# Altium PCB Kanaloa_v2.0.0_Waho.PcbDoc
Units mil, origin at the board's own origin, x right, y up, seen from the top; angles counter-clockwise.
Board outline 7712.99 x 7999.7 mil, 4 copper layers (Top Layer, +24V, Internal Plane 2, Bottom Layer), stack 62 mil thick; 22 components, 106 nets, 363 pads, 39 vias.
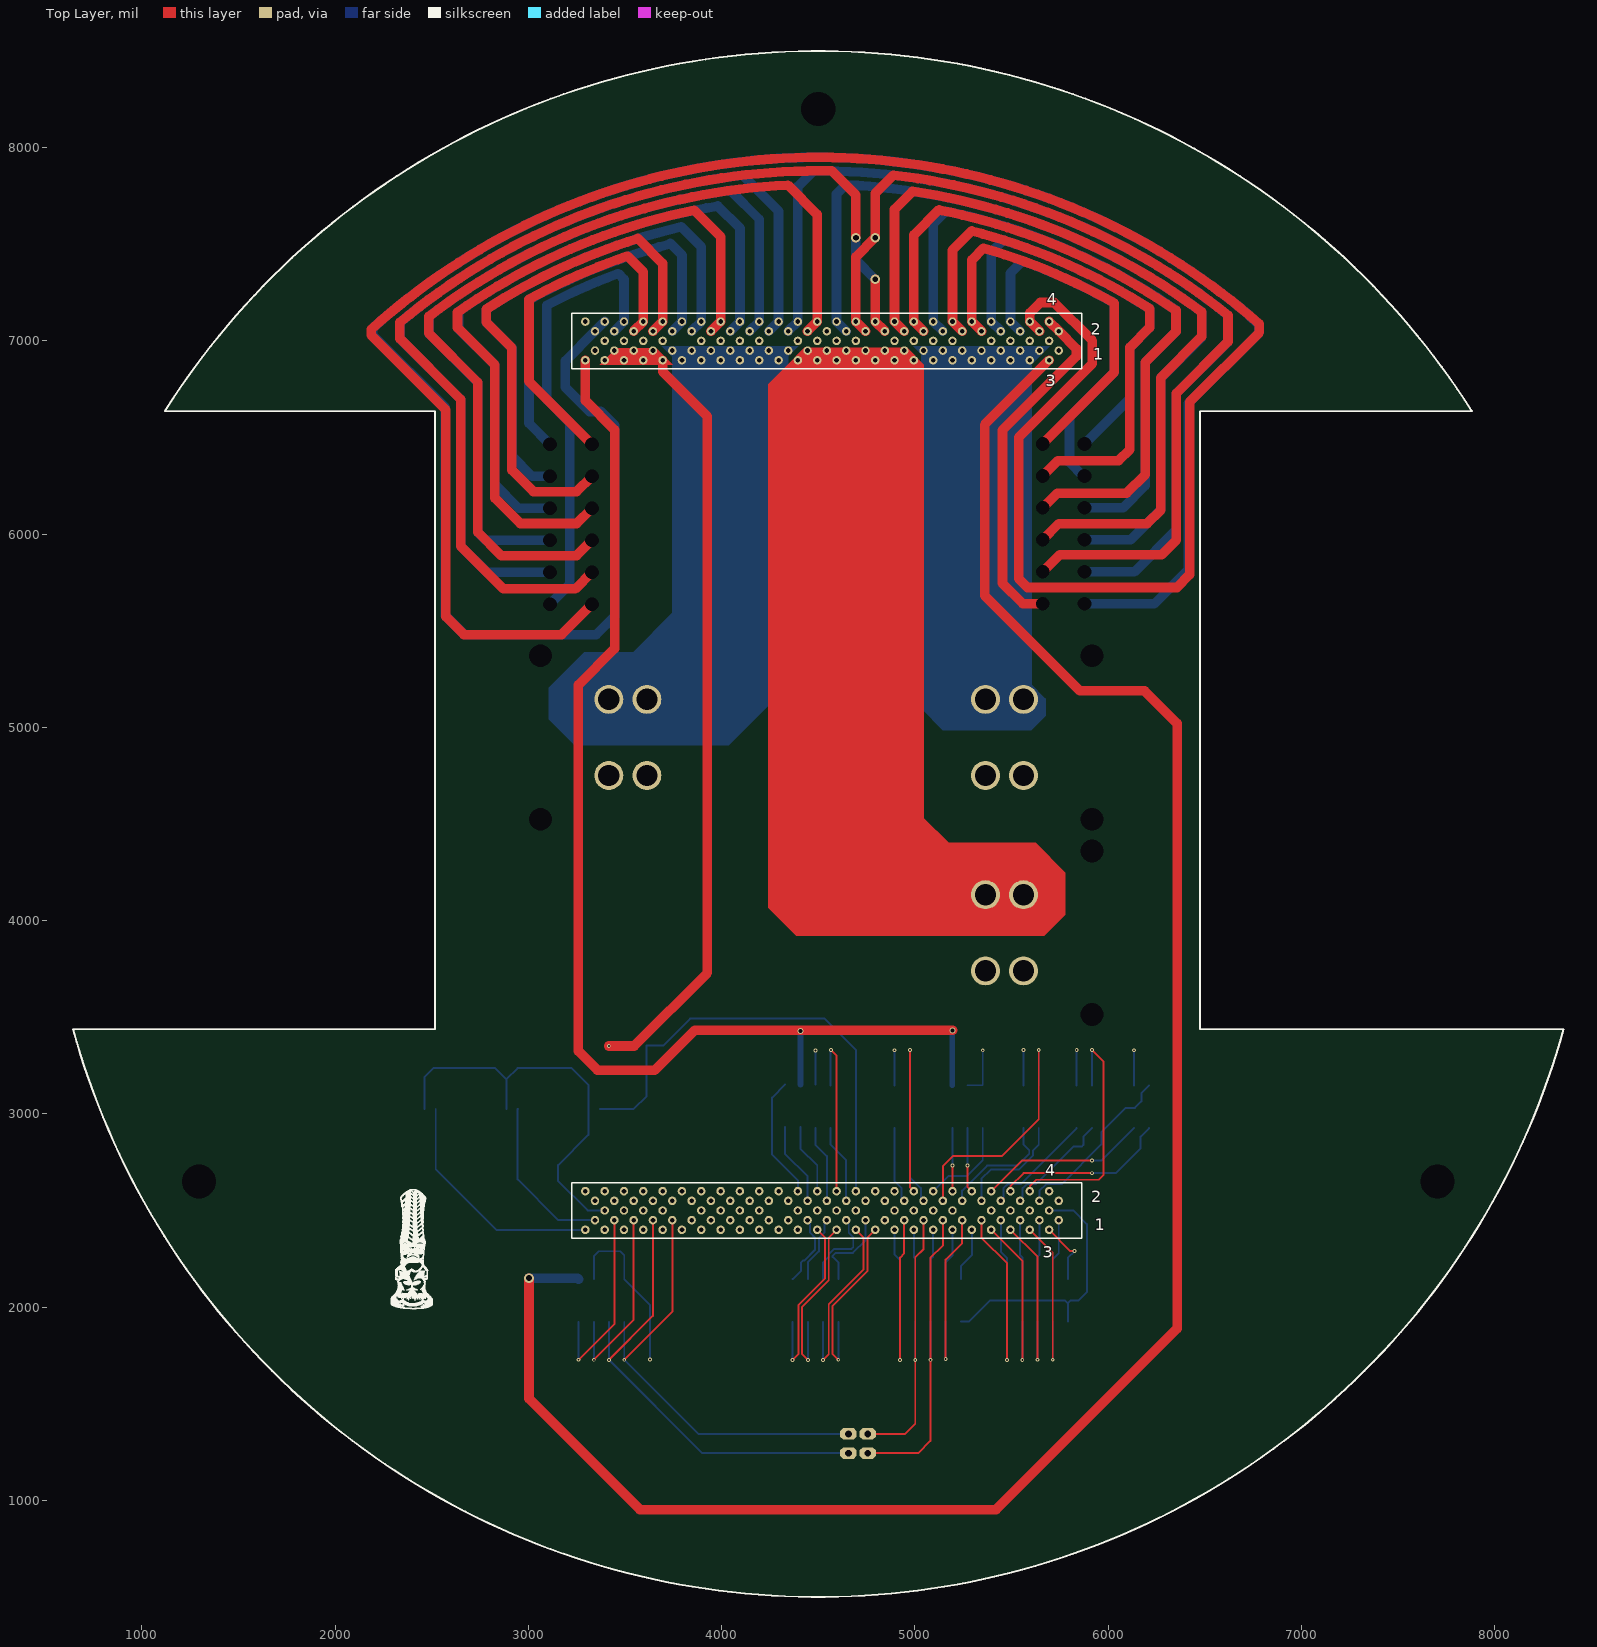
[diagram p0: Top Layer view]
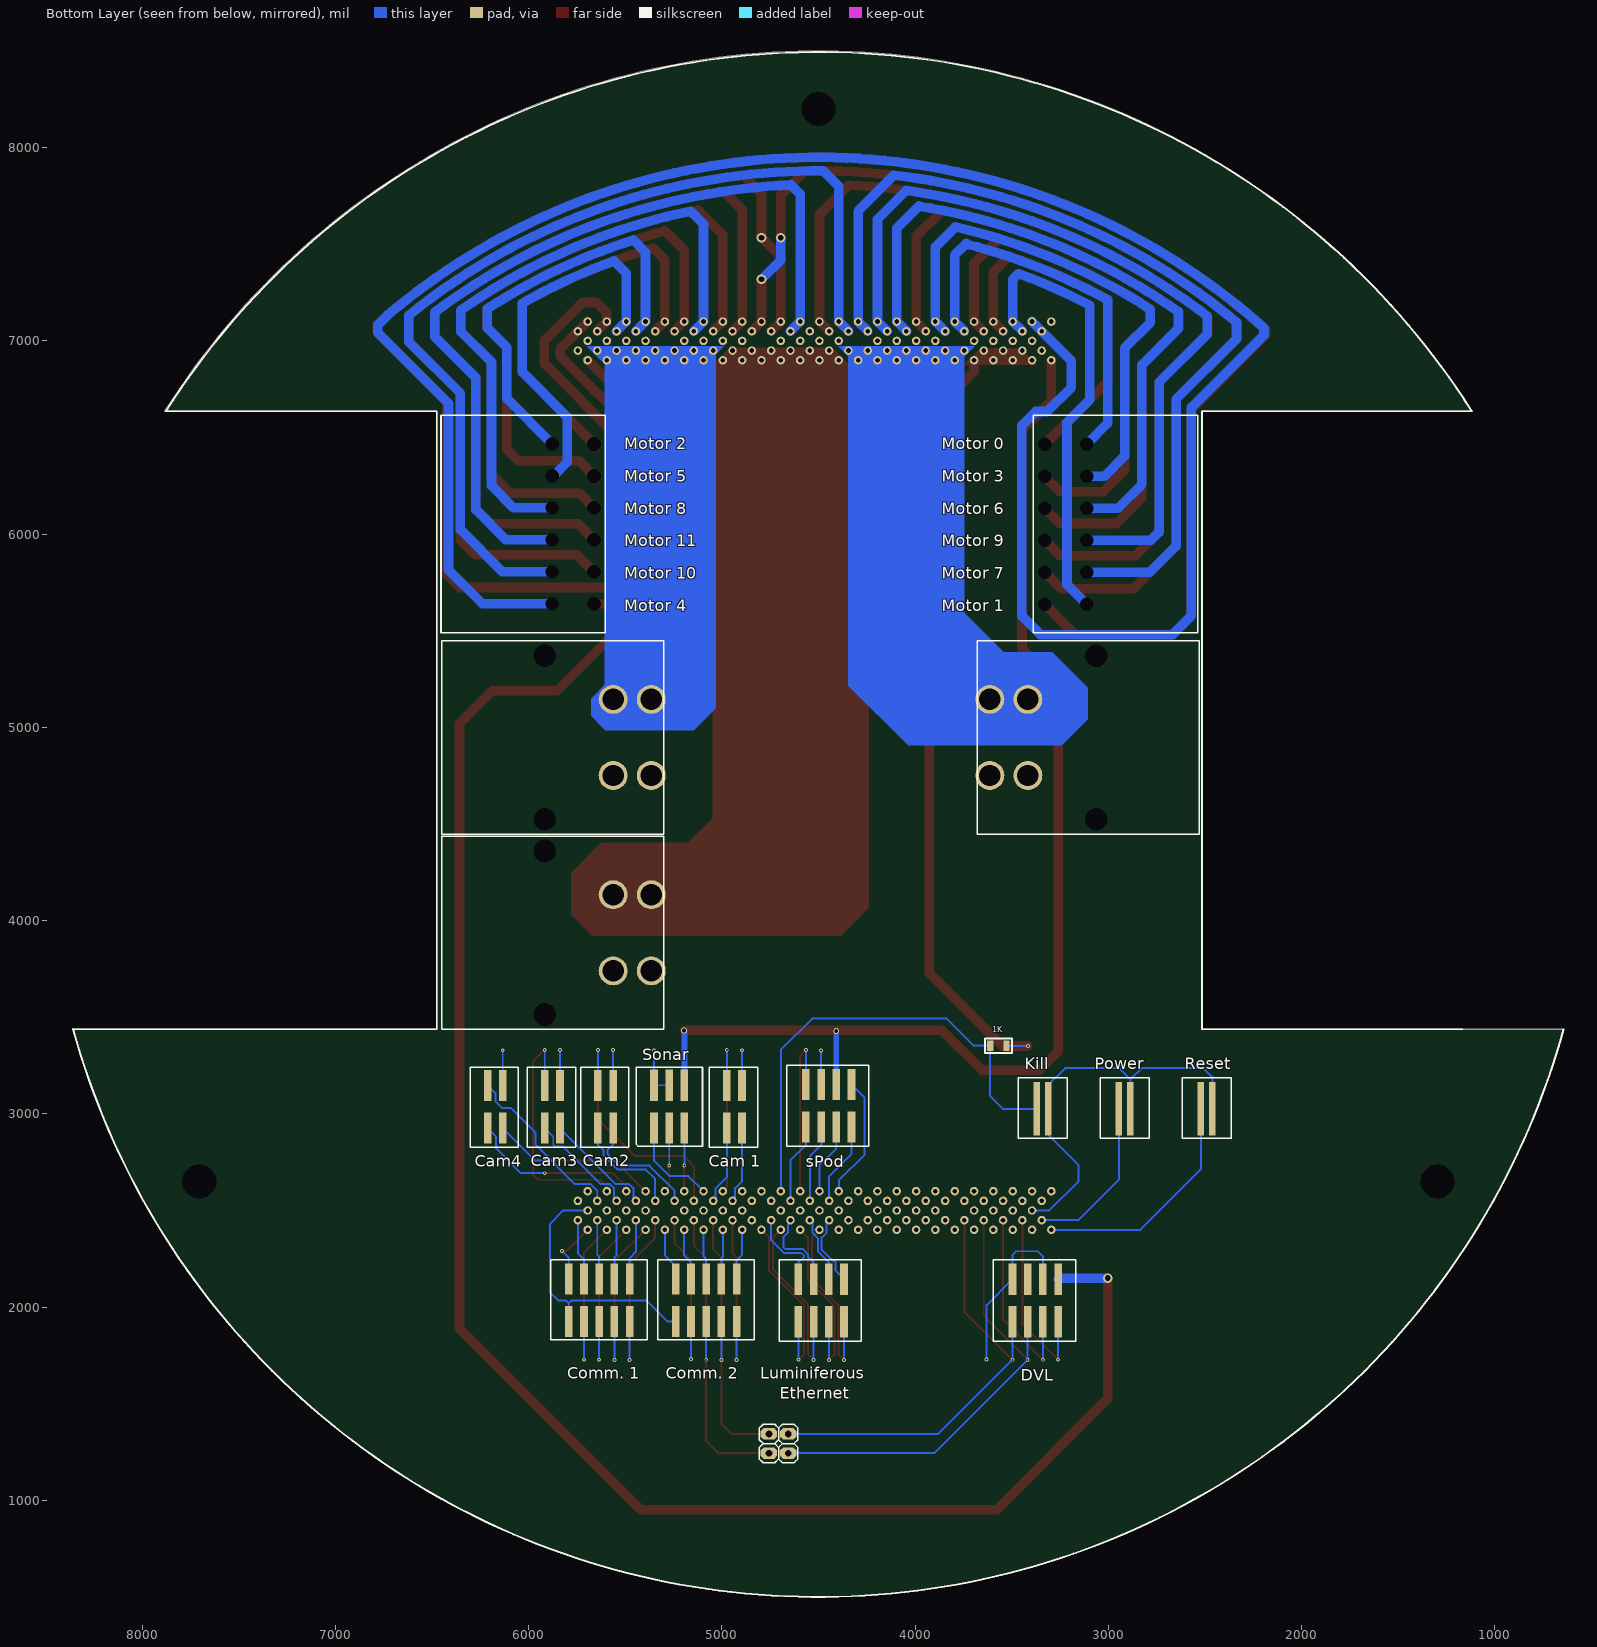
[diagram p1: Bottom Layer view, seen from below]
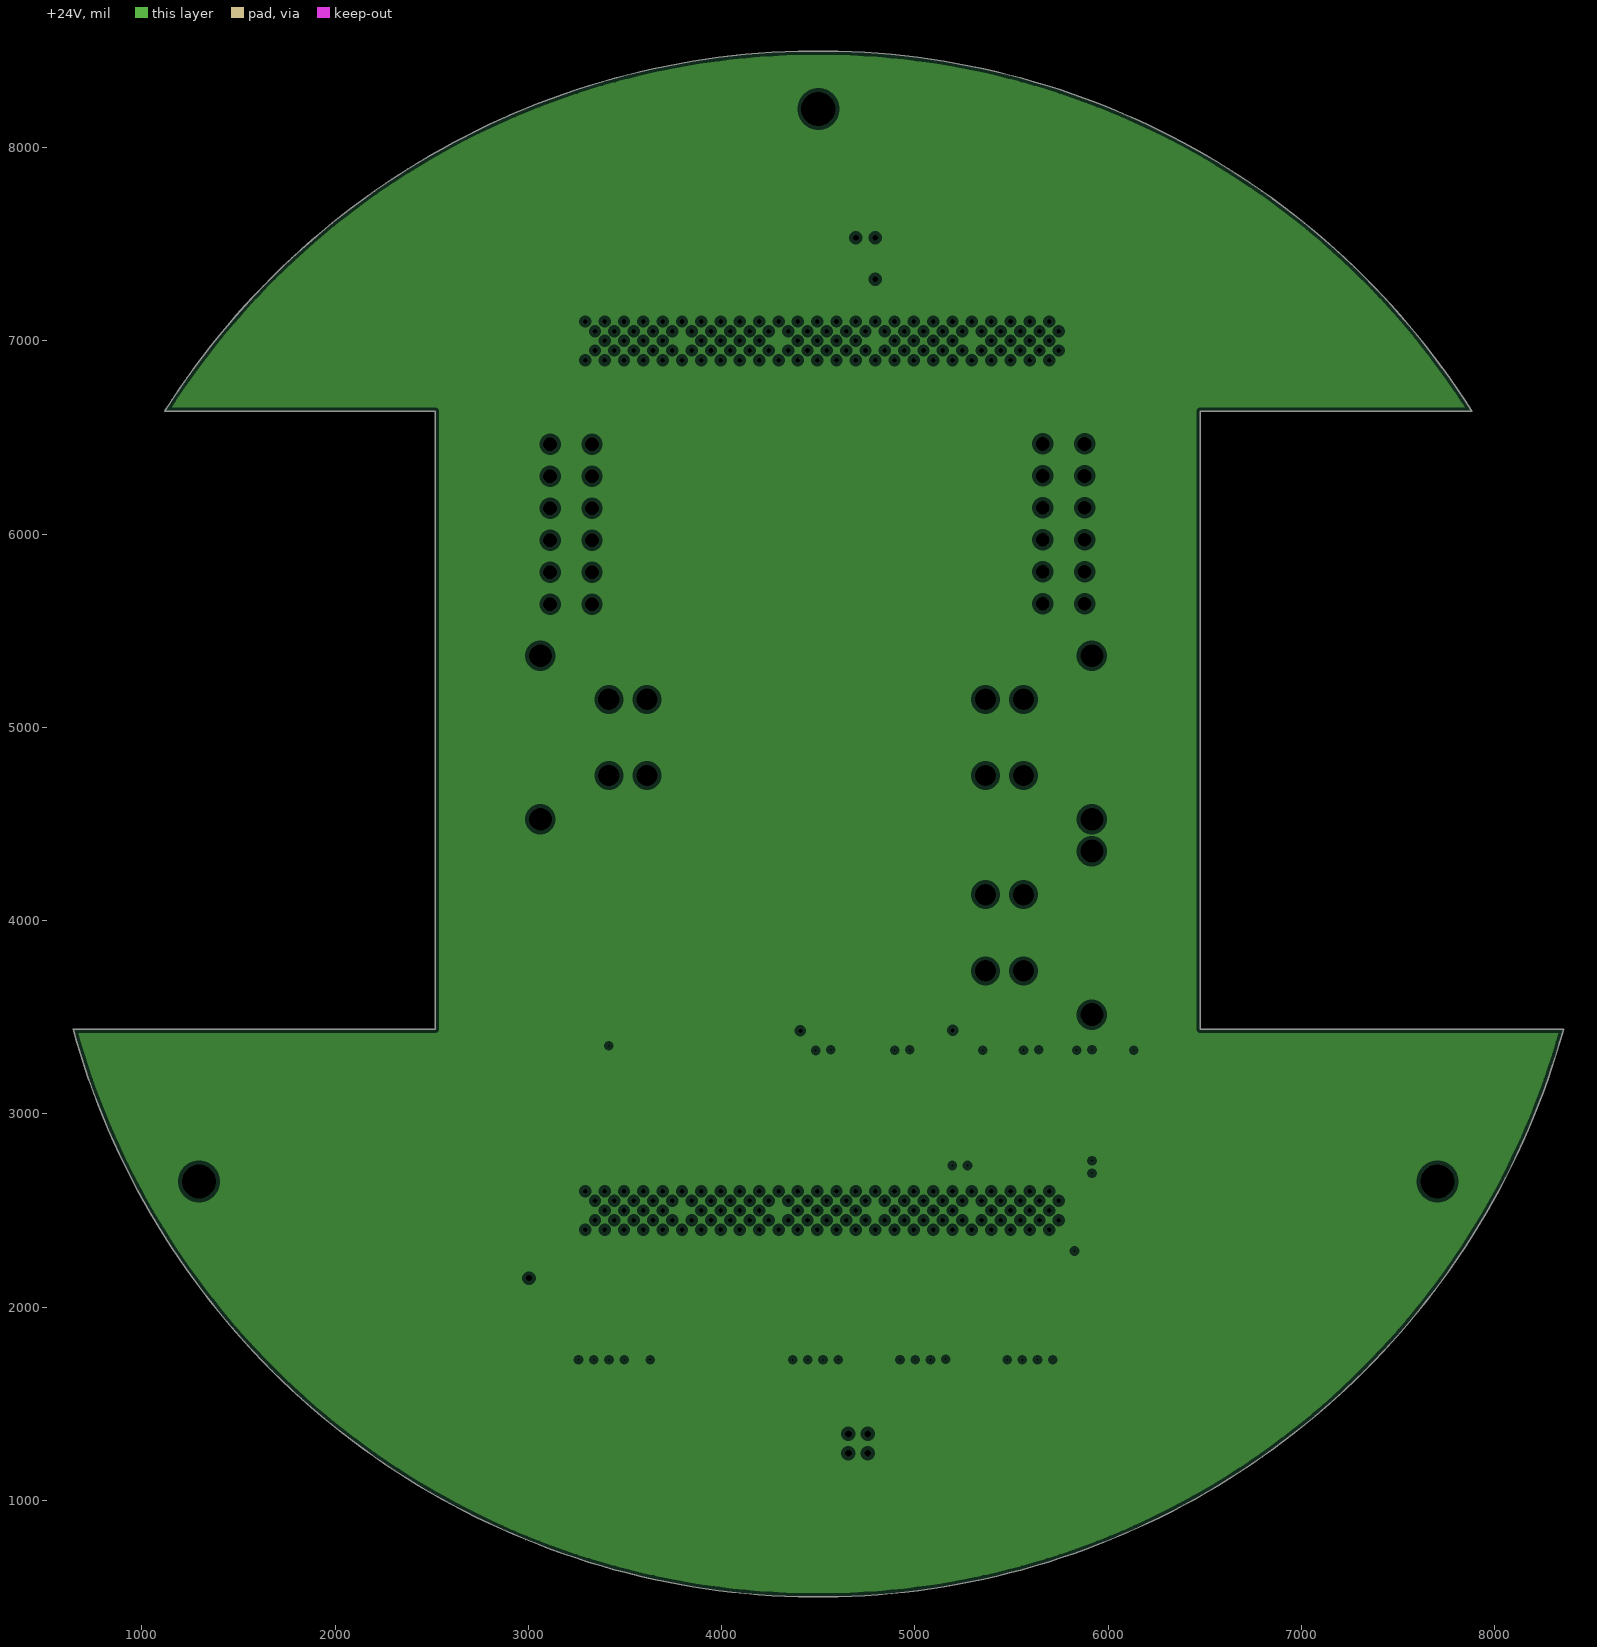
[diagram p2: +24V, clearances drawn from the general rule]
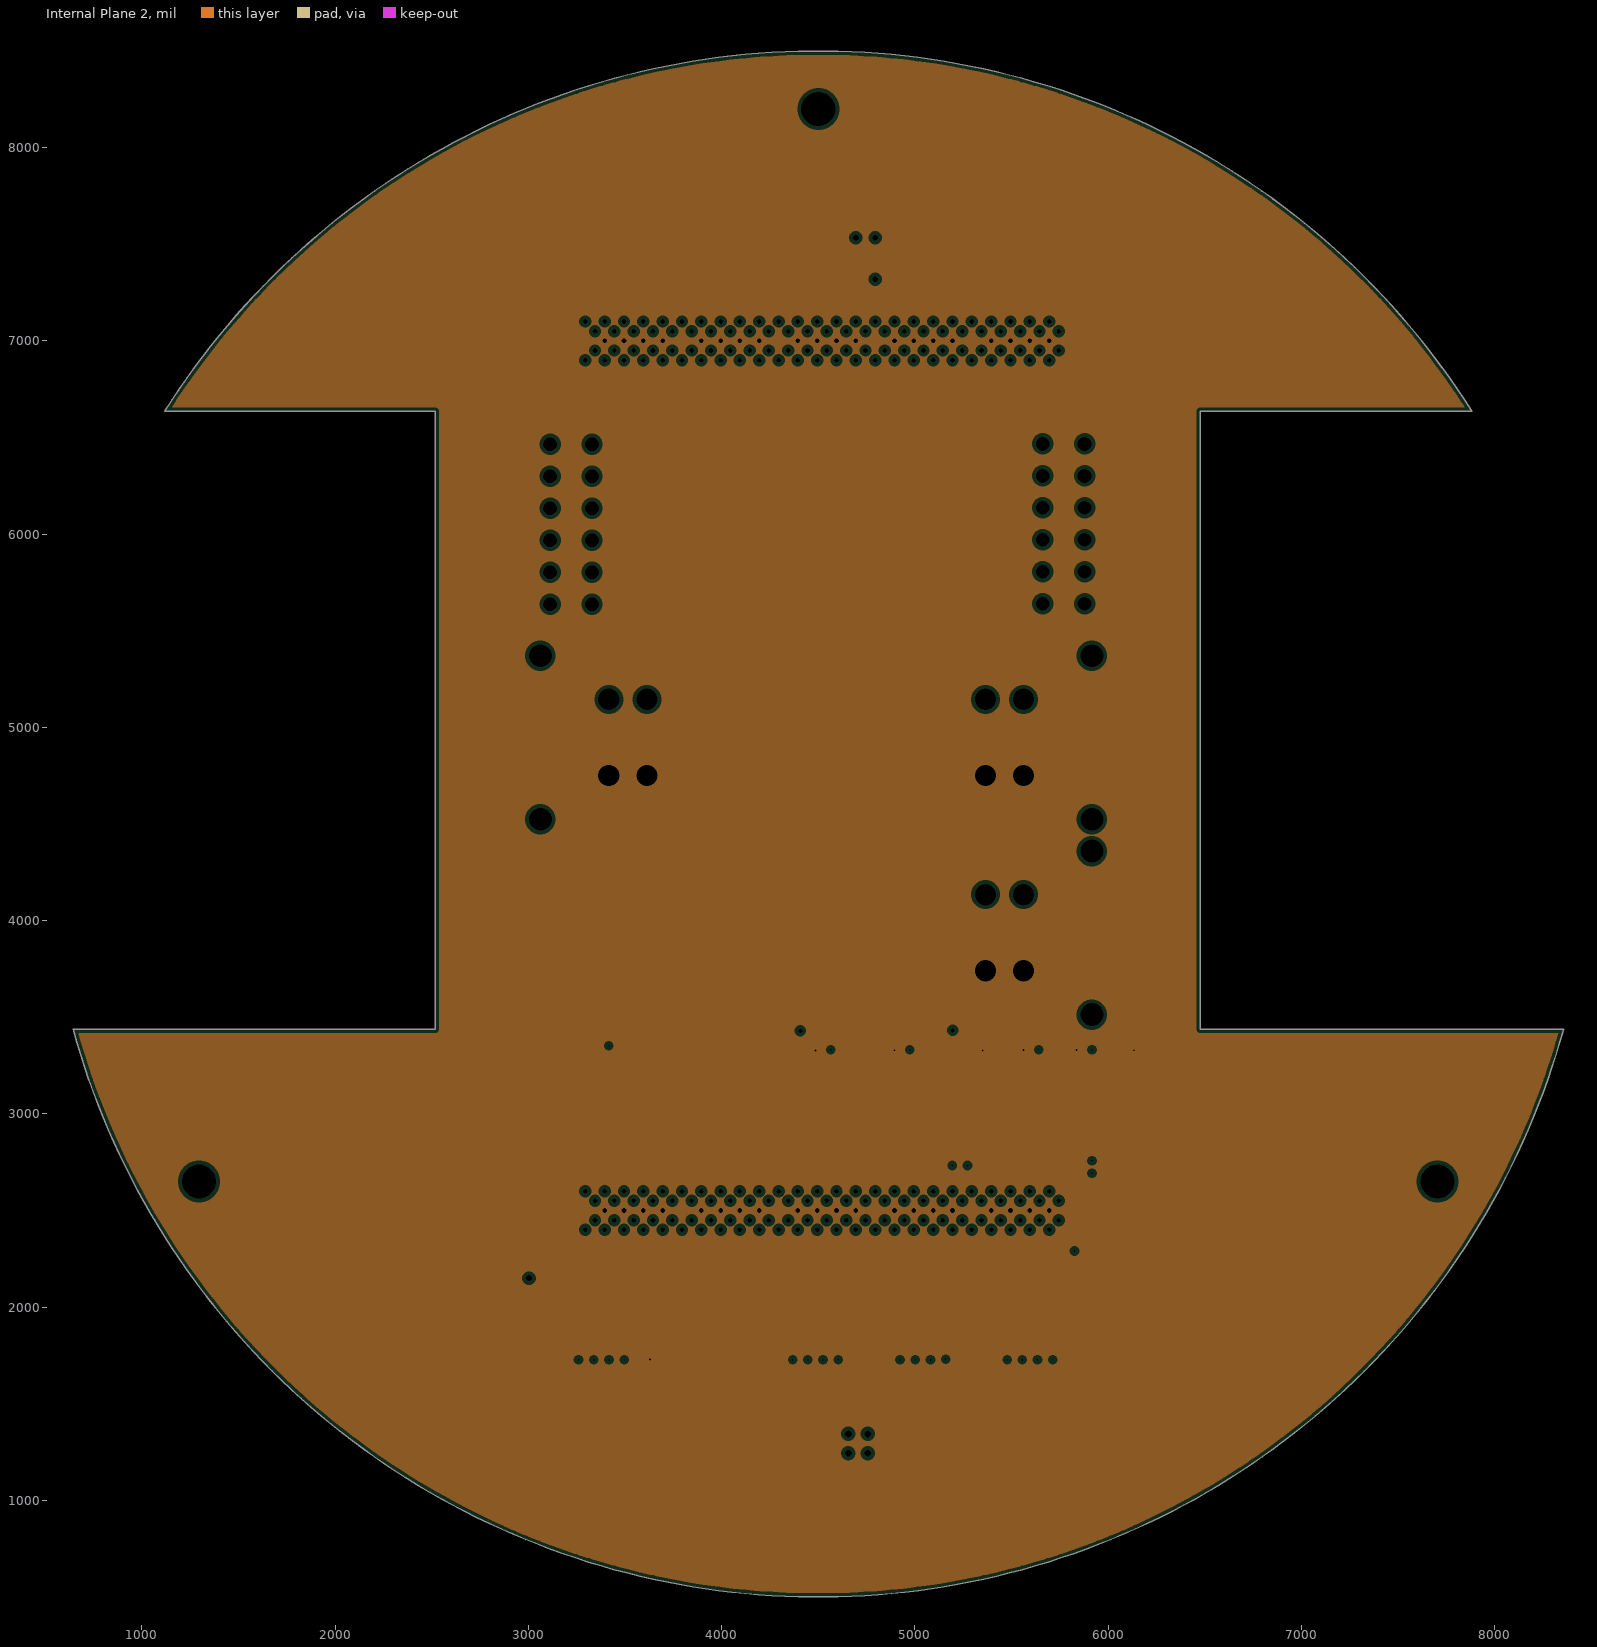
[diagram p3: Internal Plane 2, clearances drawn from the general rule]
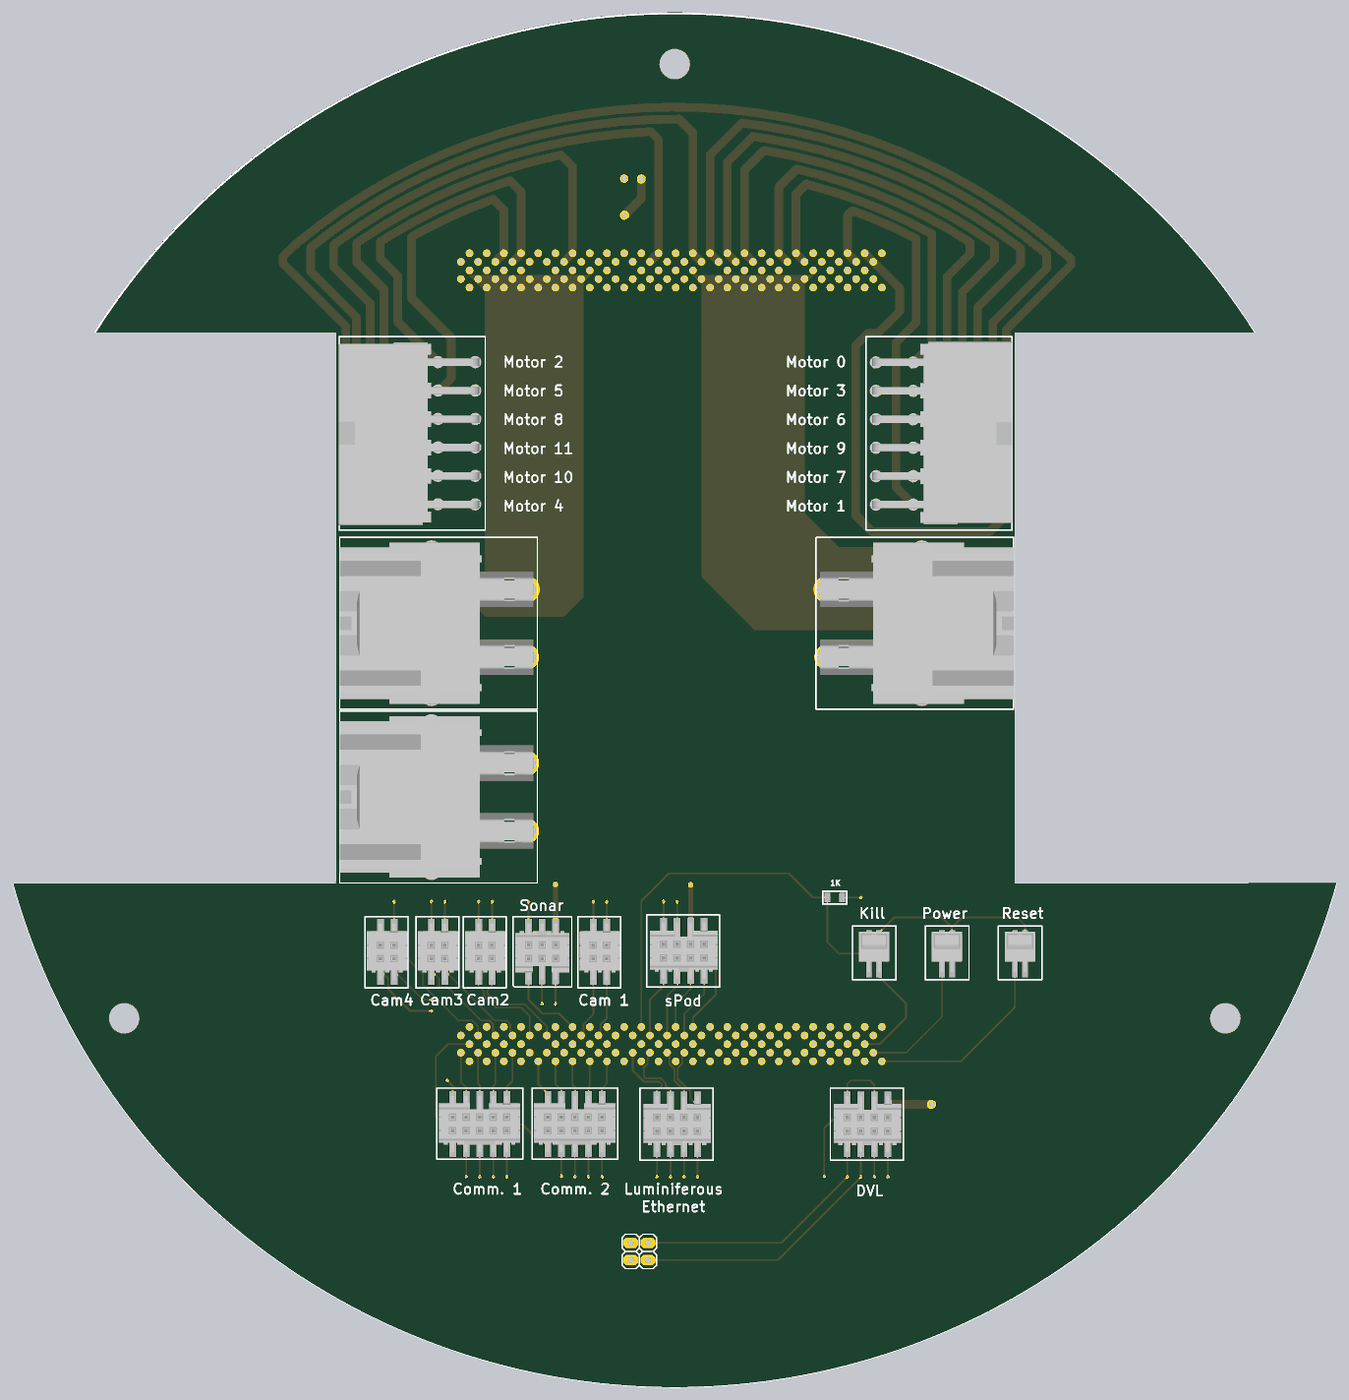
[diagram p4: 3D render of the assembled board from below, using the file's embedded part models]

## Layer stack, top to bottom
Top Layer: signal copper 1.4
Dielectric: core 8.2, FR-4, Dk 4.8
+24V: plane copper 1.4, net +24V
Dielectric: prepreg 40, FR-4, Dk 4.8
Internal Plane 2: plane copper 1.4, net GND
Dielectric: core 8.2, FR-4, Dk 4.8
Bottom Layer: signal copper 1.4

## Board outline
643.66,3438 2517,3438 2517,6636 1118.22,6636 1118.22,6636.25 cw(c4500,4500) 7881.87,6636.11 7881.87,6636 6476,6636 6476,3438 8356.55,3438 8356.45,3438.03 cw(c4500,4500)

## Design rules (kind name [scope] priority, off if disabled: settings)
Clearance [All] p1: gap=10
DiffPairsRouting [All] p1: maxlimit=10 minlimit=10 mostfreqgap=10 maxuncoupledlength=500
PlaneClearance [All] p1: clearance=20
PlaneConnect PlaneConnect_1 [(ObjectKind = 'Pad') And (Name = '-GND')] p1: planeconnectstyle=Direct reliefexpansion=20 reliefentries=4 reliefconductorwidth=10 reliefairgap=10
PlaneConnect [All] p2: planeconnectstyle=Relief reliefexpansion=20 reliefentries=4 reliefconductorwidth=10 reliefairgap=10
PolygonConnect [All] p1: connectstyle=Relief reliefconductorwidth=10 reliefentries=4 polygonreliefangle="90 Angle"
RoutingVias [All] p1: holewidth=28 width=50 viastyle="Through Hole" minholewidth=28 minwidth=50 maxholewidth=28 maxwidth=50
SilkscreenOverComponentPads [All] p1: minsilkscreentomaskgap=10
SolderMaskExpansion [All] p1: expansion=4
Width [All] p1: maxlimit=1000 minlimit=10 preferedwidth=10
24 further rules are at their usual default settings.

## Classes and differential pairs
differential pair USB1: +USB_DP_1 -USB_DM_1
differential pair USB2: +USB_DP_2 -USB_DM_2
differential pair USB_DM_3: +USB_DP_3 -USB_DM_3
differential pair USB4: +USB_DP_4 -USB_DM_4
differential pair USB5: +USB_DP_5 -USB_DM_5
differential pair SonarDiff: +Sonar_DP -Sonar_DM
differential pair LAN0: +LAN0 -LAN0#
differential pair LAN1: +LAN1 -LAN1#
differential pair LAN2: +LAN2 -LAN2#
differential pair Lan3: +LAN3 -LAN3#
differential pair Kill_Diff: +Kill_DP -Kill_DM
differential pair USB_7: +USB_DP_7 -USB_DM_7
differential pair USB_6: +USB_DP_6 -USB_DM_6

## Components (designator, comment, footprint, x,y, rotation, side; value= is the part's Value field where it differs from the comment)
? "" "5536272-4 CON" 4544.49,2500 r0 top
? "" "Male 2x2" 4656,1244 r90 bottom
? "" 46911-1012 3112,6464.8 r90 bottom
? "" 46911-1012 5878,5639.8 r270 bottom
? "" "Molex 42820-2213" 6450,3937 r270 bottom
? "" "Molex 42820-2213" 6450,4948 r270 bottom
? "sPod" 98424-G52-08ALF 4563.74,2926.76 r180 bottom
? "Cam 1" 98424-G52-04ALF 4974,2926.76 r180 bottom
? "Cam2" 98424-G52-04ALF 5641,2926.76 r180 bottom
? "Cam3" 98424-G52-04ALF 5916,2926.76 r180 bottom
? "Cam4" 98424-G52-04ALF 6212,2926.76 r180 bottom
? "Sonar" 98424-G52-06ALF 5194.78,3152.76 r0 bottom
? "" 98424-G52-08ALF 4602.24,1919.24 r180 bottom
? "DVL" 98424-G52-08ALF 3494.48,1919.24 r180 bottom
? "Comm. 1" "FCI 10POS" 5792,2035.57 r180 bottom
? "Comm. 2" "FCI 10POS" 5238.12,2035.57 r180 bottom
? "" "Molex 42820-2213" 2528,4948 r90 bottom
? "" "5536272-4 CON" 4544.49,7000 r0 top
? "" 5-1775443-2 2491,3026 r180 bottom
? "" 5-1775443-2 2915.5,3026 r180 bottom
? "" 5-1775443-2 3340,3026 r180 bottom
? "1K" "R 0805 (2012) RESISTOR" 3569,3353 r180 bottom

## Footprints (in the part's own frame and the unit in brackets; to place one, negate y for a bottom-side part, rotate by r counter-clockwise, add the part's x,y. Pads: shape width x height; smd on the part's side, far side on the other; paste and mask are expansions set on the pad)
5-1775443-2 [mm] "CONN HEADER 1.5MM 2 POS Vert SMD"
  rect 0.85x7 smd: 1(-0.75,0) 2(0.75,0)
  silkscreen extent -3.2,-3.86 3.25,4.09, body extent -2.25,-2.73 2.25,3.27, height 4.95
46911-1012 [mil] "12 Pos Right Angle Molex Conn"
  round 60 hole 71: 1(0,0) 2(-165.4,0) 3(-330.8,0) 4(-496.2,0) 5(-661.6,0) 6(-827,0) 7(0,217) 8(-165.4,217) 9(-330.8,217) 10(-496.2,217) 11(-661.6,217) 12(-827,217)
  silkscreen extent -975,-575 150,275, body extent -942,-576 122,240, height 444
98424-G52-04ALF [mm] "FCI Connector"
  rect 1x4.1 smd: 1(0,0) 2(2,0) 3(0,5.6) 4(2,5.6)
  silkscreen extent -2.29,-2.54 4.06,8, body extent -2.03,-1.71 3.97,7.29, height 6.43
98424-G52-06ALF [mm] "FCI 6pos"
  rect 1x4.1 smd: 1(-0.032,0.121) 2(1.968,0.121) 3(3.968,0.121) 4(-0.032,5.721) 5(1.968,5.721) 6(3.968,5.721)
  silkscreen extent -2.41,-2.26 6.27,8.15, body extent -2.04,-1.57 5.96,7.43, height 6.43
98424-G52-08ALF [mm] "FCI 8Pos"
  rect 1x4.1 smd: 1(-0.032,0.121) 2(1.968,0.121) 3(3.968,0.121) 4(5.968,0.121) 5(-0.032,5.721) 6(1.968,5.721) 7(3.968,5.721) 8(5.968,5.721)
  silkscreen extent -2.54,-2.41 8.26,8.25, body extent -2.05,-1.6 7.95,7.4, height 6.43
"5536272-4 CON" [mil] "TE Mezzanine Connector"
  round 44 hole 24 mask+0: 1(1200,-50) 2(1200,50) 3(1150,-100) 4(1150,100) 5(1100,-50) 6(1100,50) 7(1050,-100) 8(1050,100) 9(1000,-50) 10(1000,50) 11(950,-100) 12(950,100) 13(900,-50) 14(900,50) 15(850,-100) 16(850,100) 17(800,-50) 18(800,50) 19(750,-100) 20(750,100) 21(700,-50) 22(700,50) 23(650,-100) 24(650,100) 25(600,-50) 26(600,50) 27(550,-100) 28(550,100) 29(500,-50) 30(500,50) 31(450,-100) 32(450,100) 33(400,-50) 34(400,50) 35(350,-100) 36(350,100) 37(300,-50) 38(300,50) 39(250,-100) 40(250,100) 41(200,-50) 42(200,50) 43(150,-100) 44(150,100) 45(100,-50) 46(100,50) 47(50,-100) 48(50,100) 49(0,-50) 50(0,50) 51(-50,-100) 52(-50,100) 53(-100,-50) 54(-100,50) 55(-150,-100) 56(-150,100) 57(-200,-50) 58(-200,50) 59(-250,-100) 60(-250,100) 61(-300,-50) 62(-300,50) 63(-350,-100) 64(-350,100) 65(-400,-50) 66(-400,50) 67(-450,-100) 68(-450,100) 69(-500,-50) 70(-500,50) 71(-550,-100) 72(-550,100) 73(-600,-50) 74(-600,50) 75(-650,-100) 76(-650,100) 77(-700,-50) 78(-700,50) 79(-750,-100) 80(-750,100) 81(-800,-50) 82(-800,50) 83(-850,-100) 84(-850,100) 85(-900,-50) 86(-900,50) 87(-950,-100) 88(-950,100) 89(-1000,-50) 90(-1000,50) 91(-1050,-100) 92(-1050,100) 93(-1100,-50) 94(-1100,50) 95(-1150,-100) 96(-1150,100) 97(-1200,-50) 98(-1200,50) 99(-1250,-100) 100(-1250,100) GND(-1150,0) GND(-1050,0) GND(-950,0) GND(-850,0) GND(-650,0) GND(-550,0) GND(-450,0) GND(-350,0) GND(-150,0) GND(-50,0) GND(50,0) GND(150,0) GND(350,0) GND(450,0) GND(550,0) GND(650,0) GND(850,0) GND(950,0) GND(1050,0) GND(1150,0)
  silkscreen extent -1320,-143 1320,143, body extent -1377,-139 1337,149, height 341
"FCI 10POS" [mm] "98424-G52-10ALF"
  rect 1x4.1 smd: 1(0,-2.8) 2(2,-2.8) 3(4,-2.8) 4(6,-2.8) 5(8,-2.8) 6(0,2.8) 7(2,2.8) 8(4,2.8) 9(6,2.8) 10(8,2.8)
  silkscreen extent -2.34,-5.2 10.34,5.3, body extent -2.04,-4.5 9.96,4.5, height 6.43
"Male 2x2" [mil]
  oct 60x85 hole 35: 1(0,0) 2(100,0) 3(0,100) 4(100,100)
  silkscreen extent -50,-50 150,150, body extent -50,-50 150,150, height 460
"Molex 42820-2213" [mil] "MOLEX mini-fit senior"
  round 150 hole 110: 0(-197,1085) 2(-197,888) 3(197,888) ""(197,1085)
  round 60 hole 118: 4(-423,534) 5(423,534)
  silkscreen extent -500,0 500,1150, body extent -469,0 469,1126, height 563
"R 0805 (2012) RESISTOR" [mm] "0805 (2012) Resistor"
  rect 0.85x1.4 smd: 1(-1.075,0) 2(1.075,0)
  silkscreen extent -1.78,-0.95 1.78,0.95, body extent -1.19,-0.65 1.19,0.65, height 0.85

## Free pads (board coordinates)
  round 0 hole 177: 10(4500,8200) 11(1295.71,2650) 12(7704.29,2650)

## Via types
v1: diameter 20, hole 10, Top Layer to Bottom Layer, 33 vias
v2: diameter 50, hole 30, Top Layer to Bottom Layer, 4 vias
v3: diameter 30, hole 20, Top Layer to Bottom Layer, 2 vias

## Nets (pads, with @x,y where several pads share a name; then routed paths per layer and width w, separated by ;. In a path a pad name is that pad's centre, name@x,y a point inside that pad or via, vN(x,y) a via of type N, cw(c..) or ccw(c..) an arc to the next point about the centre after c; other vN are vias at no path point)
+3.3V: ?.1@5744.49,6950
+5V: ?.2@3526.68,3353 ?.83@3694.49,6900 ?.85@3644.49,6950 ?.87@3594.49,6900 ?.89@3544.49,6950 ?.91@3494.49,6900 ?.93@3444.49,6950 ?.95@3394.49,6900 | length 4044
  Top Layer w50: v1@3416,3351 3547,3351 3926,3730 3926,6609 3694.49,6840.51 ?.83@3694.49,6900
  Bottom Layer w10: v1(3416,3352) 3525.68,3352 ?.2@3526.68,3353
+12V: ?.1@5193.52,3148 ?.7@4407.52,3152 ?.99@3294.49,6900 | length 6341.1
  Top Layer w50: ?.99@3294.49,6900 3294.49,6691.51 3446,6540 3446,5408 3258,5220 3258,3325 3357,3226 3654,3226 3860,3432 v3(5195,3432)
  Bottom Layer w30: ?.7@4407.52,3152 v3(4407.52,3429.52) ; ?.1@5193.52,3148 5193.52,3430.52 v3(5195,3432)
+24V: 
+24VReg: ?.3@5694.49,6900 ?.8@3259.52,2144.47 | length 10620
  Top Layer w50: v2(3003,2150) 3003,1526 3577,952 5420,952 6357,1889 6357,5020 6188,5189 5854,5189 5361,5682 5361,6566.51 ?.3@5694.49,6900
  Bottom Layer w50: v2(3003,2150) 3253.99,2150 ?.8@3259.52,2144.47
BAT1: ?.0@5365,5145 ?.2@5562,5145 ?.5@5644.49,6950 ?.7@5594.49,6900 ?.9@5544.49,6950 ?.11@5494.49,6900 ?.13@5444.49,6950 ?.15@5394.49,6900 ?.17@5344.49,6950 ?.19@5294.49,6900 ?.21@5244.49,6950 ?.23@5194.49,6900 ?.25@5144.49,6950 ?.27@5094.49,6900 ?.29@5044.49,6950
BAT2: ?.0@5365,4134 ?.2@5562,4134 ?.31@4994.49,6900 ?.33@4944.49,6950 ?.35@4894.49,6900 ?.37@4844.49,6950 ?.39@4794.49,6900 ?.41@4744.49,6950 ?.43@4694.49,6900 ?.45@4644.49,6950 ?.47@4594.49,6900 ?.49@4544.49,6950 ?.51@4494.49,6900 ?.53@4444.49,6950 ?.55@4394.49,6900
Com1_5v: ?.3@5694.49,2400 ?.6@5792,2145.81 | length 335.3
  Top Layer w10: ?.3@5694.49,2400 5804.49,2290 v1(5826,2290)
  Bottom Layer w10: ?.6@5792,2145.81 5792,2256 v1(5826,2290)
Com2_5V: ?.6@5238.12,2145.81 ?.19@5294.49,2400 | length 277.5
  Bottom Layer w10: ?.6@5238.12,2145.81 5238.12,2212.12 5294.49,2268.49 ?.19@5294.49,2400
CTS: ?.5@5644.49,2450 ?.8@5634.52,2145.81 | length 308.3
  Bottom Layer w10: ?.8@5634.52,2145.81 5634.52,2260.52 5644.49,2270.49 ?.5@5644.49,2450
CTS_2: ?.8@5080.64,2145.81 ?.27@5094.49,2400 | length 259.9
  Bottom Layer w10: ?.8@5080.64,2145.81 5080.64,2247.64 5094.49,2261.49 ?.27@5094.49,2400
DCD: ?.5@5477.04,1925.34 ?.17@5344.49,2450 | length 976.2
  Top Layer w10: ?.17@5344.49,2450 5344.49,2358.51 5477.04,2225.96 v1(5477.04,1727.04)
  Bottom Layer w10: v1(5477.04,1727.04) ?.5@5477.04,1925.34
DCD_2: ?.5@4923.16,1925.34 ?.33@4944.49,2450 | length 929.9
  Top Layer w10: v1(4923.16,1727.16) 4923.16,2256.16 4944.49,2277.49 ?.33@4944.49,2450
  Bottom Layer w10: v1(4923.16,1727.16) ?.5@4923.16,1925.34
DSR: ?.10@5477.04,2145.81 ?.13@5444.49,2450 | length 317.7
  Bottom Layer w10: ?.13@5444.49,2450 5444.49,2285.51 5477.04,2252.96 ?.10@5477.04,2145.81
DSR_2: ?.10@4923.16,2145.81 ?.35@4894.49,2400 | length 266.1
  Bottom Layer w10: ?.35@4894.49,2400 4894.49,2271.51 4923.16,2242.84 ?.10@4923.16,2145.81
DTR: ?.2@5713.26,1925.34 ?.7@5594.49,2400 | length 919.1
  Top Layer w10: ?.7@5594.49,2400 5713.26,2281.23 v1(5713.26,1727.74)
  Bottom Layer w10: v1(5713.26,1727.74) ?.2@5713.26,1925.34
DTR_2: ?.2@5159.38,1925.34 ?.21@5244.49,2450 | length 952.2
  Top Layer w10: v1(5159.38,1731) 5159.38,2245.38 5244.49,2330.49 ?.21@5244.49,2450
  Bottom Layer w10: v1@5159.38,1727.38 v1(5159.38,1731) ?.2@5159.38,1925.34
"DVL IN A": ?.4@3259.52,1924 ?.93@3444.49,2450 | length 995.7
  Top Layer w10: v1(3259.52,1727.48) 3444.49,1912.45 ?.93@3444.49,2450
  Bottom Layer w10: v1(3259.52,1727.48) ?.4@3259.52,1924
"DVL IN B": ?.3@3338.26,1924 ?.89@3544.49,2450 | length 1004.9
  Top Layer w10: v1(3338.26,1727.26) 3544.49,1933.49 ?.89@3544.49,2450
  Bottom Layer w10: v1(3338.26,1727.26) ?.3@3338.26,1924
"DVL OUT A": ?.1@4656,1244 ?.2@3417,1924 ?.85@3644.49,2450 | length 2453.3
  Top Layer w10: v1(3417,1727) 3644.49,1954.49 ?.85@3644.49,2450
  Bottom Layer w10: ?.2@3417,1924 v1(3417,1727) 3900,1244 ?.1@4656,1244
"DVL OUT B": ?.1@3495.74,1924 ?.2@4656,1344 ?.81@3744.49,2450 | length 2341.5
  Top Layer w10: v1(3495.74,1727.26) 3744.49,1976.01 ?.81@3744.49,2450
  Bottom Layer w10: ?.1@3495.74,1924 v1(3495.74,1727.26) 3879,1344 ?.2@4656,1344
DVL+: 
DVL-: 
DVLComm: 
ExPre: ?.2@5744.49,2550
"EXT PWR": ?.3@3416,5145 ?.57@4344.49,6950 ?.59@4294.49,6900 ?.61@4244.49,6950 ?.63@4194.49,6900 ?.65@4144.49,6950 ?.67@4094.49,6900 ?.69@4044.49,6950 ?.71@3994.49,6900 ?.73@3944.49,6950 ?.75@3894.49,6900 ?.77@3844.49,6950 ?.79@3794.49,6900 ?.81@3744.49,6950 ?.@3613,5145
GND: ?.0@3613,4751 ?.1@5238.12,1925.34 ?.1@5792,1925.34 ?.2@2461.47,3026 ?.2@2885.97,3026 ?.2@3310.47,3026 ?.2@3416,4751 ?.2@5272.26,3148 ?.3@5351,3148 ?.3@5562,3740 ?.3@5562,4751 ?.4@4895.26,3147.24 ?.4@5562.26,3147.24 ?.4@5837.26,3147.24 ?.4@6133.26,3147.24 ?.5@3495.74,2144.47 ?.6@4486.26,3152 ?.7@3338.26,2144.47 ?.@5365,3740 ?.@5365,4751 ?.GND | length 5590.1
  Bottom Layer w10: ?.2@2461.47,3026 2461.47,3190.47 2508,3237 2827.94,3237 2885.97,3178.97 ; ?.2@2885.97,3026 2885.97,3178.97 ; ?.7@3338.26,2144.47 3338.26,2263.26 3364,2289 3475,2289 3495.74,2268.26 3495.74,2144.47 3630,2010.21 v1(3630,1728) ; ?.GND@3394.49,2500 3306,2500 3154,2652 3154,2735 3310.47,2891.47 3310.47,3026 3310.47,3149.53 3223,3237 2944,3237 2885.97,3178.97 ; ?.6@4486.26,3152 v1(4486.26,3328.26) ; ?.4@4895.26,3147.24 v1(4895.26,3329.26) ; ?.1@5238.12,1925.34 5279.34,1925.34 5388,2034 5778,2034 5792,2020 ; ?.2@5272.26,3148 5351,3148 v1(5351,3329) ; ?.4@5562.26,3147.24 v1(5562.26,3329.74) ; ?.GND@5694.49,2500 5820,2500 5890,2430 5890,2078 5847,2035 5807,2035 5792,2020 ; ?.1@5792,1925.34 5792,2020 ; ?.4@5837.26,3147.24 v1(5837.26,3329.74) ; ?.4@6133.26,3147.24 v1(6133.26,3329.26)
Kill_5:  | length 3.3
  Top Layer w10: 3892.14,2397.65 3894.49,2400
Kill_DM: 
Kill_DP: 
LAN0: ?.8@4367.28,2144.47 ?.53@4444.49,2450 | length 373.4
  Bottom Layer w10: ?.8@4367.28,2144.47 4411.33,2188.53 4411.33,2231.39 4420.12,2240.18 4426.92,2240.18 4483,2296.26 4483,2359.16 4457.49,2384.67 4457.49,2437 ?.53@4444.49,2450
LAN0#: ?.7@4446.02,2144.47 ?.49@4544.49,2450 | length 346.3
  Bottom Layer w10: ?.7@4446.02,2144.47 4446.02,2231 4503,2287.98 4503,2356.18 4531.49,2384.67 4531.49,2437 ?.49@4544.49,2450
LAN1: ?.4@4367.28,1924 ?.51@4494.49,2400 | length 955.4
  Top Layer w10: v1(4367.28,1727) 4396.65,1756.37 4396.65,2010.28 4534,2147.63 4534,2360.49 ?.51@4494.49,2400
  Bottom Layer w10: v1(4367.28,1727) ?.4@4367.28,1924
LAN1#: ?.3@4446.02,1924 ?.47@4594.49,2400 | length 955.8
  Top Layer w10: v1(4446.02,1727.02) 4416.65,1756.39 4416.65,2002 4554,2139.35 4554,2359.51 ?.47@4594.49,2400
  Bottom Layer w10: v1(4446.02,1727.02) ?.3@4446.02,1924
LAN2: ?.6@4524.76,2144.47 ?.45@4644.49,2450 | length 437.6
  Bottom Layer w10: ?.6@4524.76,2144.47 4524.76,2231 4554.13,2260.37 4554.13,2273.28 4581.85,2301 4671,2301 4681,2311 4681,2361.16 4657.49,2384.67 4657.49,2437 ?.45@4644.49,2450
LAN2#: ?.5@4603.5,2144.47 ?.41@4744.49,2450 | length 440.5
  Bottom Layer w10: ?.5@4603.5,2144.47 4603.5,2231 4574.13,2260.37 4574.13,2265 4590.13,2281 4679.28,2281 4744.49,2346.21 ?.41@4744.49,2450
LAN3: ?.2@4524.76,1924 ?.43@4694.49,2400 | length 973.9
  Top Layer w10: v1(4524.76,1727) 4554.13,1756.37 4554.13,2015.28 4735,2196.15 4735,2359.49 ?.43@4694.49,2400
  Bottom Layer w10: v1(4524.76,1727) ?.2@4524.76,1924
LAN3#: ?.1@4603.5,1924 ?.39@4794.49,2400 | length 972.4
  Top Layer w10: v1(4603.5,1727.5) 4574.13,1756.87 4574.13,2007 4755,2187.87 4755,2360.51 ?.39@4794.49,2400
  Bottom Layer w10: v1(4603.5,1727.5) ?.1@4603.5,1924
LAN_3V: ?.37@4844.49,2450
MISO_sPod: ?.8@4328.78,3152 ?.56@4394.49,2600 | length 635.4
  Bottom Layer w10: ?.8@4328.78,3152 4261,3084.22 4261,2789 4394.49,2655.51 ?.56@4394.49,2600
MOSI_sPod: ?.4@4328.78,2931.53 ?.54@4444.49,2550 | length 429.5
  Bottom Layer w10: ?.4@4328.78,2931.53 4328.78,2792.22 4444.49,2676.51 ?.54@4444.49,2550
"Motor 0+": ?.7@3329,6464.8 ?.88@3594.49,7100 ?.90@3544.49,7050 | length 1885.3
  Top Layer w50: ?.7@3329,6464.8 3003,6790.8 3003,7214.59 cw(c4500,4500) 3512.48,7438.5 3594.49,7356.49 3594.49,7100 ?.90@3544.49,7050
"Motor 0-": ?.1@3112,6464.8 ?.80@3794.49,7100 ?.82@3744.49,7050 | length 2085.3
  Bottom Layer w50: 3006.14,7214.87 3003,7211.73 ; ?.1@3112,6464.8 3003,6573.8 3003,7211.73 ; 3734.1,7503.9 3794.49,7443.51 3794.49,7100 ?.82@3744.49,7050 ; 3734.72,7501.48 ccw(c4500,4500) 3003,7211.73
"Motor 1+": ?.6@5644.49,7050 ?.8@5594.49,7100 ?.12@3329,5637.8 | length 11846
  Top Layer w50: ?.12@3329,5637.8 3171.2,5480 2666,5480 2573,5573 2573,6643 2186,7030 2186,7058.89 cw(c4500,4500) 6782,7087.47 6782,7044 6422,6684 6422,5790 6356,5724 5583,5724 5537,5770 5537,6501 5918,6882 5918,7001 5720,7199 5649,7199 5594.49,7144.49 5594.49,7100 ?.6@5644.49,7050
"Motor 1-": ?.6@3112,5637.8 ?.92@3494.49,7100 ?.94@3444.49,7050 | length 2373.2
  Bottom Layer w50: ?.6@3112,5637.8 3213.2,5739 3213.2,6577.8 3095,6696 3095,7184.56 cw(c4500,4500) 3465.18,7347.82 3494.49,7318.51 3494.49,7100 ?.94@3444.49,7050
"Motor 2+": ?.12@5661,6466.8 ?.18@5344.49,7050 ?.20@5294.49,7100 | length 2093.7
  Top Layer w50: ?.18@5344.49,7050 5294.49,7100 5294.49,7419.4 5354.88,7479.8 cw(c4500,4500) 6032,7194.99 6032,6837.8 ?.12@5661,6466.8
"Motor 2-": ?.6@5878,6466.8 ?.14@5444.49,7050 ?.16@5394.49,7100 | length 2196.2
  Bottom Layer w50: ?.14@5444.49,7050 5394.49,7100 5394.49,7458.49 5457.83,7521.83 cw(c4500,4500) 6214.5,7166.34 6214.5,7068.5 6112,6966 6112,6700.8 ?.6@5878,6466.8
"Motor 3+": ?.8@3329,6299.4 ?.84@3694.49,7100 ?.86@3644.49,7050 | length 2802.4
  Top Layer w50: ?.8@3329,6299.4 3249.6,6220 3026,6220 2914.6,6331.4 2914.6,6963 2782,7095.6 2782,7164.09 cw(c4500,4500) 3566.55,7529.45 3694.49,7401.51 3694.49,7100 ?.86@3644.49,7050
"Motor 3-": ?.2@3112,6299.4 ?.76@3894.49,7100 ?.78@3844.49,7050 | length 2759.4
  Bottom Layer w50: ?.2@3112,6299.4 3019.6,6299.4 2915,6404 2915,6963 2782,7096 2782,7164.09 cw(c4500,4500) 3790.97,7589.69 3894.49,7486.17 3894.49,7100 ?.78@3844.49,7050
"Motor 4+": ?.2@5744.49,7050 ?.4@5694.49,7100 ?.7@5661,5639.8 | length 1823.8
  Top Layer w50: ?.7@5661,5639.8 5558.2,5639.8 5453,5745 5453,6538 5836,6921 5836,6958.49 5744.49,7050 ?.4@5694.49,7100
"Motor 4-": ?.1@5878,5639.8 ?.96@3394.49,7100 ?.98@3344.49,7050 | length 11398.5
  Bottom Layer w50: 2194.12,7066.21 2194.12,7030.88 2570,6655 2570,5578 2668,5480 3351,5480 3447,5576 3447,6563 3375,6635 3316,6635 3191,6760 3191,6896.51 3344.49,7050 ?.96@3394.49,7100 ; 2194.14,7066.23 cw(c4500,4500) 6727.52,7134.51 ; ?.1@5878,5639.8 6238.8,5639.8 6414,5815 6414,6676 6780,7042 6780,7082.03 6727.5,7134.53
"Motor 5+": ?.11@5661,6301.4 ?.22@5244.49,7050 ?.24@5194.49,7100 | length 2868.7
  Top Layer w50: ?.22@5244.49,7050 5194.49,7100 5194.49,7469.49 5293.96,7568.96 cw(c4500,4500) 6215,7166.02 6215,7069 6112,6966 6112,6438 6054,6380 5739.6,6380 ?.11@5661,6301.4
"Motor 5-": ?.5@5878,6301.4 ?.10@5544.49,7050 ?.12@5494.49,7100 | length 1960
  Bottom Layer w50: ?.10@5544.49,7050 5494.49,7100 5494.49,7350.49 5557.9,7413.9 cw(c4500,4500) 6032.02,7194.98 6032,6839 5800,6607 5800,6372 5870.6,6301.4 ?.5@5878,6301.4
"Motor 6+": ?.9@3329,6134 ?.72@3994.49,7100 ?.74@3944.49,7050 | length 3678
  Top Layer w50: ?.9@3329,6134 3250,6055 2958,6055 2826.2,6186.8 2826.2,6875 2633,7068.2 2633,7148 cw(c4500,4500) 3858.2,7675.8 3994.49,7539.51 3994.49,7100 ?.74@3944.49,7050
"Motor 6-": ?.3@3112,6134 ?.68@4094.49,7100 ?.70@4044.49,7050 | length 3485.6
  Bottom Layer w50: ?.3@3112,6134 2950,6134 2826,6258 2826,6875 2638.31,7062.69 2638.31,7151.73 cw(c4500,4500) 3979.54,7697.92 4094.49,7582.97 4094.49,7100 ?.70@4044.49,7050
"Motor 7+": ?.11@3329,5803.2 ?.38@4844.49,7050 ?.40@4794.49,7100 | length 5457.2
  Top Layer w50: ?.11@3329,5803.2 3242.8,5717 2871,5717 2649.4,5938.6 2649.4,6698 2335,7012.4 2335,7095.61 cw(c4500,4500) 4570.26,7879.27 4694.49,7755.03 v2(4694.49,7534) ; v2(4794.49,7319) 4794.49,7100 ?.38@4844.49,7050
  Bottom Layer w50: v2(4694.49,7534) 4694.49,7419 v2(4794.49,7319)
"Motor 7-": ?.5@3112,5803.2 ?.60@4294.49,7100 ?.62@4244.49,7050 | length 4667.3
  Bottom Layer w50: ?.5@3112,5803.2 2784.8,5803.2 2649,5939 2649,6698 2336.29,7010.71 2336.29,7096.69 cw(c4500,4500) 4108.72,7857.28 4294.49,7671.51 4294.49,7100 ?.62@4244.49,7050
"Motor 8+": ?.10@5661,6136 ?.30@5044.49,7050 ?.32@4994.49,7100 | length 3564.1
  Top Layer w50: ?.30@5044.49,7050 4994.49,7100 4994.49,7547.98 5125.55,7679.04 ; 5125.2,7677.26 cw(c4500,4500) 6351,7157 ; ?.10@5661,6136 5737,6212 6095.25,6212 6192.25,6309 6192.25,6890 6351,7048.75 6351,7159.21
"Motor 8-": ?.4@5878,6136 ?.26@5144.49,7050 ?.28@5094.49,7100 | length 3309.6
  Bottom Layer w50: ?.26@5144.49,7050 5094.49,7100 5094.49,7604.51 5161.69,7671.71 cw(c4500,4500) 6350.82,7159.33 6350.82,7048.82 6192,6890 6192,6251 6077,6136 ?.4@5878,6136
"Motor 9+": ?.10@3329,5968.6 ?.52@4494.49,7100 ?.54@4444.49,7050 | length 4744.1
  Top Layer w50: ?.10@3329,5968.6 3249.4,5889 2859,5889 2737.8,6010.2 2737.8,6786 2484.38,7039.42 2484.87,7125.9 cw(c4500,4500) 4342.74,7806.26 4494.49,7654.51 4494.49,7100 ?.54@4444.49,7050
"Motor 9-": ?.4@3112,5968.6 ?.64@4194.49,7100 ?.66@4144.49,7050 | length 4132
  Bottom Layer w50: ?.4@3112,5968.6 2778.4,5968.6 2737,6010 2737,6786 2487.14,7035.86 2487.14,7127.64 cw(c4500,4500) 4045.37,7778.63 4194.49,7629.51 4194.49,7100 ?.66@4144.49,7050
"Motor 10+": ?.8@5661,5805.2 ?.42@4744.49,7050 ?.44@4694.49,7100 | length 4844.2
  Top Layer w50: ?.42@4744.49,7050 4694.49,7100 4694.49,7434 v2(4794.49,7534) 4794.49,7762.89 4889.13,7857.53 cw(c4500,4500) 6620,7132.49 6620,6996.25 6352.75,6729 6352.75,5969 6276.75,5893 5748.8,5893 ?.8@5661,5805.2
"Motor 10-": ?.2@5878,5805.2 ?.56@4394.49,7100 ?.58@4344.49,7050 | length 4985.3
  Bottom Layer w50: ?.58@4344.49,7050 4394.49,7100 4394.49,7800 4474.39,7879.9 cw(c4500,4500) 6619.04,7133.26 6619.04,6995.04 6353,6729 6353,6023 6135.2,5805.2 ?.2@5878,5805.2
"Motor 11+": ?.9@5661,5970.6 ?.34@4944.49,7050 ?.36@4894.49,7100 | length 4208.6
  Top Layer w50: ?.34@4944.49,7050 4894.49,7100 4894.49,7680.49 4987.85,7773.85 cw(c4500,4500) 6484,7149.5 6484,7021.5 6272.5,6810 6272.5,6125 6201.5,6054 5744.4,6054 ?.9@5661,5970.6
"Motor 11-": ?.3@5878,5970.6 ?.46@4644.49,7050 ?.48@4594.49,7100 | length 4362.1
  Bottom Layer w50: 4641.12,7806.99 cw(c4500,4500) 6484.93,7148.8 6484.93,7020.93 6273,6809 6273,6127 6116.6,5970.6 ?.3@5878,5970.6 ; ?.46@4644.49,7050 4594.49,7100 4594.49,7760 4641.1,7806.61 4649.71,7806.61
PWRBTN#: ?.1@2945.03,3026 ?.97@3344.49,2450 | length 853.3
  Bottom Layer w10: ?.1@2945.03,3026 2944,3024.97 2944,2661 3155,2450 ?.97@3344.49,2450
RI: ?.1@5744.49,2450 ?.7@5713.26,2145.81 | length 317.1
  Bottom Layer w10: ?.7@5713.26,2145.81 5713.26,2248.26 5744.49,2279.49 ?.1@5744.49,2450
RI_2: ?.7@5159.38,2145.81 ?.23@5194.49,2400 | length 268.7
  Bottom Layer w10: ?.7@5159.38,2145.81 5159.38,2231.38 5194.49,2266.49 ?.23@5194.49,2400
RSTBTN#: ?.1@2520.53,3026 ?.99@3294.49,2400 | length 1216.3
  Bottom Layer w10: ?.1@2520.53,3026 2520.53,2713.47 2834,2400 ?.99@3294.49,2400
RTS: ?.9@5544.49,2450 ?.9@5555.78,2145.81 | length 308.9
  Bottom Layer w10: ?.9@5544.49,2450 5544.49,2268.51 5555.78,2257.22 ?.9@5555.78,2145.81
RTS_2: ?.9@5001.9,2145.81 ?.31@4994.49,2400 | length 257.3
  Bottom Layer w10: ?.31@4994.49,2400 4994.49,2258.51 5001.9,2251.1 ?.9@5001.9,2145.81
RXD: ?.4@5555.78,1925.34 ?.15@5394.49,2400 | length 937.7
  Top Layer w10: ?.15@5394.49,2400 5555.78,2238.71 v1(5555.78,1727.22)
  Bottom Layer w10: v1(5555.78,1727.22) ?.4@5555.78,1925.34
RXD_2: ?.4@4756,1344 ?.4@5001.9,1925.34 ?.29@5044.49,2450 | length 1537.4
  Top Layer w10: ?.4@4756,1344 4950,1344 5001.9,1395.9 v1(5001.9,1727.1) 5001.9,2257.9 5044.49,2300.49 ?.29@5044.49,2450
  Bottom Layer w10: v1(5001.9,1727.1) ?.4@5001.9,1925.34
SCK_sPod: ?.3@4407.52,2931.53 ?.52@4494.49,2600 | length 367.6
  Bottom Layer w10: ?.3@4407.52,2931.53 4407.52,2820.48 4494.49,2733.51 ?.52@4494.49,2600
Sonar_5V: ?.96@3394.49,2600
Sonar_DM: 
Sonar_DP: 
Sonar_Gnd: 
TEMP: ?.4@5694.49,2600
TXD: ?.3@5634.52,1925.34 ?.11@5494.49,2400 | length 928.3
  Top Layer w10: ?.11@5494.49,2400 5634.52,2259.97 v1(5634.52,1727.52)
  Bottom Layer w10: v1(5634.52,1727.52) ?.3@5634.52,1925.34
TXD_2: ?.3@4756,1244 ?.3@5080.64,1925.34 ?.25@5144.49,2450 | length 1717.8
  Top Layer w10: ?.3@4756,1244 5017,1244 5080.64,1307.64 v1(5080.64,1727.36) 5080.64,2254.64 5144.49,2318.49 ?.25@5144.49,2450
  Bottom Layer w10: v1(5080.64,1727.36) ?.3@5080.64,1925.34
USB_5V_1: ?.5@4565,3152 ?.48@4594.49,2600 | length 927.5
  Top Layer w10: v1(4565,3331) 4594.49,3301.51 ?.48@4594.49,2600
  Bottom Layer w10: ?.5@4563.74,3147.24 4563.74,3329.74 v1(4565,3331)
USB_5V_2: ?.3@4974,3147.24 ?.32@4994.49,2600 | length 923.3
  Top Layer w10: v1(4974,3331) 4974,2620.49 ?.32@4994.49,2600
  Bottom Layer w10: ?.3@4974,3147.24 v1(4974,3331)
USB_5V_3: ?.3@5641,3147.24 ?.26@5144.49,2550 | length 1318.6
  Top Layer w10: ?.26@5144.49,2550 5144.49,2728.49 5198,2782 5451,2782 5641,2972 v1(5641,3331)
  Bottom Layer w10: ?.3@5641,3147.24 v1(5641,3331)
USB_5V_4: ?.3@5916,3147.24 ?.8@5594.49,2600 | length 1287.7
  Top Layer w10: ?.8@5594.49,2600 5594.49,2625.49 5628,2659 5951,2659 5977,2685 5977,3270 v1(5916,3331)
  Bottom Layer w10: ?.3@5916,3147.24 v1(5916,3331)
USB_5V_5: ?.3@6212,3147.24 ?.6@5644.49,2550 | length 907.4
  Bottom Layer w10: ?.6@5644.49,2550 5644.49,2602.33 5679.16,2637 5759.64,2637 5965,2842.36 5965,2905 6091,3031 6138.63,3031 6172,3064.37 6172,3107.24 ?.3@6212,3147.24
USB_5V_6: ?.6@5351,2927.53 ?.28@5094.49,2600 | length 490.3
  Bottom Layer w10: ?.28@5094.49,2600 5172.49,2678 5269,2678 5351,2760 ?.6@5351,2927.53
USB_5V_7: ?.38@4844.49,2550
USB_5V_8: 
USB_DM_1: ?.1@4565,2931.53 ?.46@4644.49,2550 | length 428.6
  Bottom Layer w10: ?.1@4563.74,2926.76 4563.74,2841 4644.49,2760.25 4644.49,2550 ?.46@4631.49,2563
USB_DM_2: ?.2@4895.26,2926.76 ?.34@4944.49,2550 | length 397.2
  Bottom Layer w10: ?.2@4895.26,2926.76 4895.26,2651.56 4931.49,2615.33 4931.49,2563 ?.34@4944.49,2550
USB_DM_3: ?.1@5641,2926.76 ?.18@5344.49,2550 | length 584.5
  Bottom Layer w10: ?.18@5344.49,2550 5344.49,2663.49 5393,2712 5537.91,2712 5611.63,2785.72 5611.63,2811.63 5641,2841 ?.1@5641,2926.76
USB_DM_4: ?.2@5837.26,2926.76 ?.14@5444.49,2550 | length 579.5
  Top Layer w10: ?.14@5444.49,2550 ?.14@5457.49,2563
  Bottom Layer w10: ?.14@5457.49,2563 5457.49,2615.33 5479.16,2637 5547.5,2637 ?.2@5837.26,2926.76
USB_DM_5: ?.2@6133.26,2926.76 ?.16@5394.49,2600 | length 874.1
  Top Layer w10: ?.16@5395,2600 5553,2758 v1(5916,2758)
  Bottom Layer w10: ?.16@5394.49,2600 ?.16@5395,2600 ; v1(5916,2758) 5964.5,2758 ?.2@6133.26,2926.76
USB_DM_6: ?.5@5272.26,2927.53 ?.20@5294.49,2600 | length 337
  Top Layer w10: v1(5272,2733) 5272,2622.49 ?.20@5294.49,2600
  Bottom Layer w10: v1(5272,2733) 5272,2840.74 5272.26,2841 ?.5@5272.26,2927.53
USB_DM_7: ?.40@4794.49,2600
USB_DM_8: 
USB_DP_1: ?.2@4486.26,2931.53 ?.50@4544.49,2550 | length 419.8
  Bottom Layer w10: ?.2@4485,2926.76 4485,2841 4544.49,2781.51 4544.49,2550 ?.50@4531.49,2563
USB_DP_2: ?.1@4974,2926.76 ?.30@5044.49,2550 | length 406
  Bottom Layer w10: ?.1@4974,2926.76 4974,2672.82 5031.49,2615.33 5031.49,2563 ?.30@5044.49,2550
USB_DP_3: ?.2@5562.26,2926.76 ?.22@5244.49,2550 | length 623.8
  Bottom Layer w10: ?.22@5244.49,2550 5244.49,2602.33 5374.16,2732 5529.63,2732 5591.63,2794 5591.63,2811.63 5562.26,2841 ?.2@5562.26,2926.76
USB_DP_4: ?.1@5916,2926.76 ?.10@5544.49,2550 | length 601.7
  Top Layer w10: ?.10@5531.49,2563 ?.10@5544.49,2550
  Bottom Layer w10: ?.10@5544.49,2550 5557.49,2563 5557.49,2615.33 5579.16,2637 5626.24,2637 5820.29,2831.06 5863.16,2831.06 5871.94,2839.84 5871.94,2882.71 ?.1@5916,2926.76
USB_DP_5: ?.1@6212,2926.76 ?.12@5494.49,2600 | length 903.4
  Top Layer w10: ?.12@5494.49,2600 5494.49,2624.49 5563,2693 v1(5916,2693)
  Bottom Layer w10: v1(5916,2693) 6040,2693 6167.94,2820.94 6167.94,2882.71 ?.1@6212,2926.76
USB_DP_6: ?.4@5193.52,2927.53 ?.24@5194.49,2600 | length 327.9
  Top Layer w10: v1(5194,2733) 5194.49,2732.51 ?.24@5194.49,2600
  Bottom Layer w10: ?.4@5193.52,2927.53 5193.52,2841 5194,2840.52 v1(5194,2733)
USB_DP_7: ?.36@4894.49,2600
USB_DP_8: 
"W H O K I L L": ?.1@3369.53,3026 ?.1@3611.32,3353 ?.44@4694.49,2600 | length 2473.3
  Bottom Layer w10: ?.1@3369.53,3026 3545,3026 3611.32,3092.32 3611.32,3353 3696.53,3353 3836.53,3493 4533,3493 4694.49,3331.51 4694.49,2600 ?.44@4690.64,2600
pads on no net: ?.4@3062,4525 ?.4@5916,4360 ?.4@5916,5371 ?.5@3062,5371 ?.5@5916,3514 ?.5@5916,4525 ?.6@3417,2144.47 ?.42@4744.49,2550 ?.50@4544.49,7050 ?.55@4394.49,2400 ?.57@4344.49,2450 ?.58@4344.49,2550 ?.59@4294.49,2400 ?.60@4294.49,2600 ?.61@4244.49,2450 ?.62@4244.49,2550 ?.63@4194.49,2400 ?.64@4194.49,2600 ?.65@4144.49,2450 ?.66@4144.49,2550 ?.67@4094.49,2400 ?.68@4094.49,2600 ?.69@4044.49,2450 ?.70@4044.49,2550 ?.71@3994.49,2400 ?.72@3994.49,2600 ?.73@3944.49,2450 ?.74@3944.49,2550 ?.75@3894.49,2400 ?.76@3894.49,2600 ?.77@3844.49,2450 ?.78@3844.49,2550 ?.79@3794.49,2400 ?.80@3794.49,2600 ?.82@3744.49,2550 ?.83@3694.49,2400 ?.84@3694.49,2600 ?.86@3644.49,2550 ?.87@3594.49,2400 ?.88@3594.49,2600 ?.90@3544.49,2550 ?.91@3494.49,2400 ?.92@3494.49,2600 ?.94@3444.49,2550 ?.95@3394.49,2400 ?.97@3344.49,6950 ?.98@3344.49,2550 ?.100

## Polygon pours and split planes (outlines as drawn)
+24V on +24V (split plane): 369 vertices, not listed, extent 670.02,520 8329.98,8480
GND on Internal Plane 2 (split plane): 369 vertices, not listed, extent 670.02,520 8329.98,8480

## Other copper
Top Layer:
  region net BAT2: 5047,6877 4960,6964 4428,6964 4341,6877
  region net BAT2: 5047,6877 4341,6877 4240,6776 4240,4066 4385,3921 5669,3921 5779,4031 5779,4249 5626,4402 5176,4402 5047,4531
  region net +5V: 3747,6877 3662,6962 3455,6962 3370,6877
Bottom Layer:
  region net BAT1: 4991,6972 5698,6972 5605,6879 5084,6879
  region net "EXT PWR": 4397,6972 4304,6879 3784,6879 3691,6972
  region net BAT1: 5605,6879 5605,5220 5668,5157 5676,5148 5676,5059 5603,4986 5144,4986 5032,5098 5032,6951.58
  region net "EXT PWR": 4344.49,6950 4344.49,5215.49 4036,4907 3240,4907 3105,5042 3105,5206 3289,5390 3542,5390 3744.49,5592.49 3744.49,6950

## Silkscreen, mask and mechanical layers (free items; w line width, h text height)
Top Overlay:
  drawing of 4326 lines, arcs and shapes, not listed
Bottom Overlay:
  lines w7.87: 1117,6636 2515,6636 2515,3437 1165.57,3437 1165.39,3436.82 ; 7875.37,6636 6476,6636 6476,3438 8357.03,3438
  lines w10: 643.69,3437.5 ccw(c4500,4500) 8356.49,3438.15 ; 1121.28,6639.63 cw(c4497.65,4494.83) 7875.37,6637.5
  text "Motor 0" at 3861,6439 h60
  text "Motor 2" at 5505,6439 h60
  text "Motor 3" at 3861,6271.4 h60
  text "Motor 5" at 5505,6271.4 h60
  text "Motor 6" at 3861,6103.8 h60
  text "Motor 8" at 5505,6103.8 h60
  text "Motor 9" at 3861,5936.2 h60
  text "Motor 11" at 5505,5936.2 h60
  text "Motor 7" at 3861,5768.6 h60
  text "Motor 10" at 5505,5768.6 h60
  text "Motor 1" at 3861,5601 h60
  text "Motor 4" at 5505,5601 h60
  text "Reset" at 2605,3232 h60
  text "Power" at 3068.98,3232 h60
  text "Kill" at 3433,3232 h60
  text "Luminiferous" at 4801,1629 h60
  text "Ethernet" at 4701,1526 h60

## Text inside footprints (layer, text, board x,y; h text height)
?: Top Overlay "3" at 5662.49,2256 h60; Top Overlay "4" at 5674.49,2681 h60; Top Overlay "2" at 5912.49,2542 h60; Top Overlay "1" at 5929.49,2398 h60
?: Top Overlay "1" at 5922.49,6903 h60; Top Overlay "2" at 5910.49,7033 h60; Top Overlay "4" at 5681.49,7187 h60; Top Overlay "3" at 5676.49,6764 h60